# Altium PCB PCB1.PcbDoc
Units mil, origin at the board's own origin, x right, y up, seen from the top; angles counter-clockwise.
Board outline 2505.03 x 1155.03 mil, 2 copper layers (Top Layer, Bottom Layer); 30 components, 29 nets, 108 pads, 13 vias.
Unrouted connection lines stored in the file: 1.
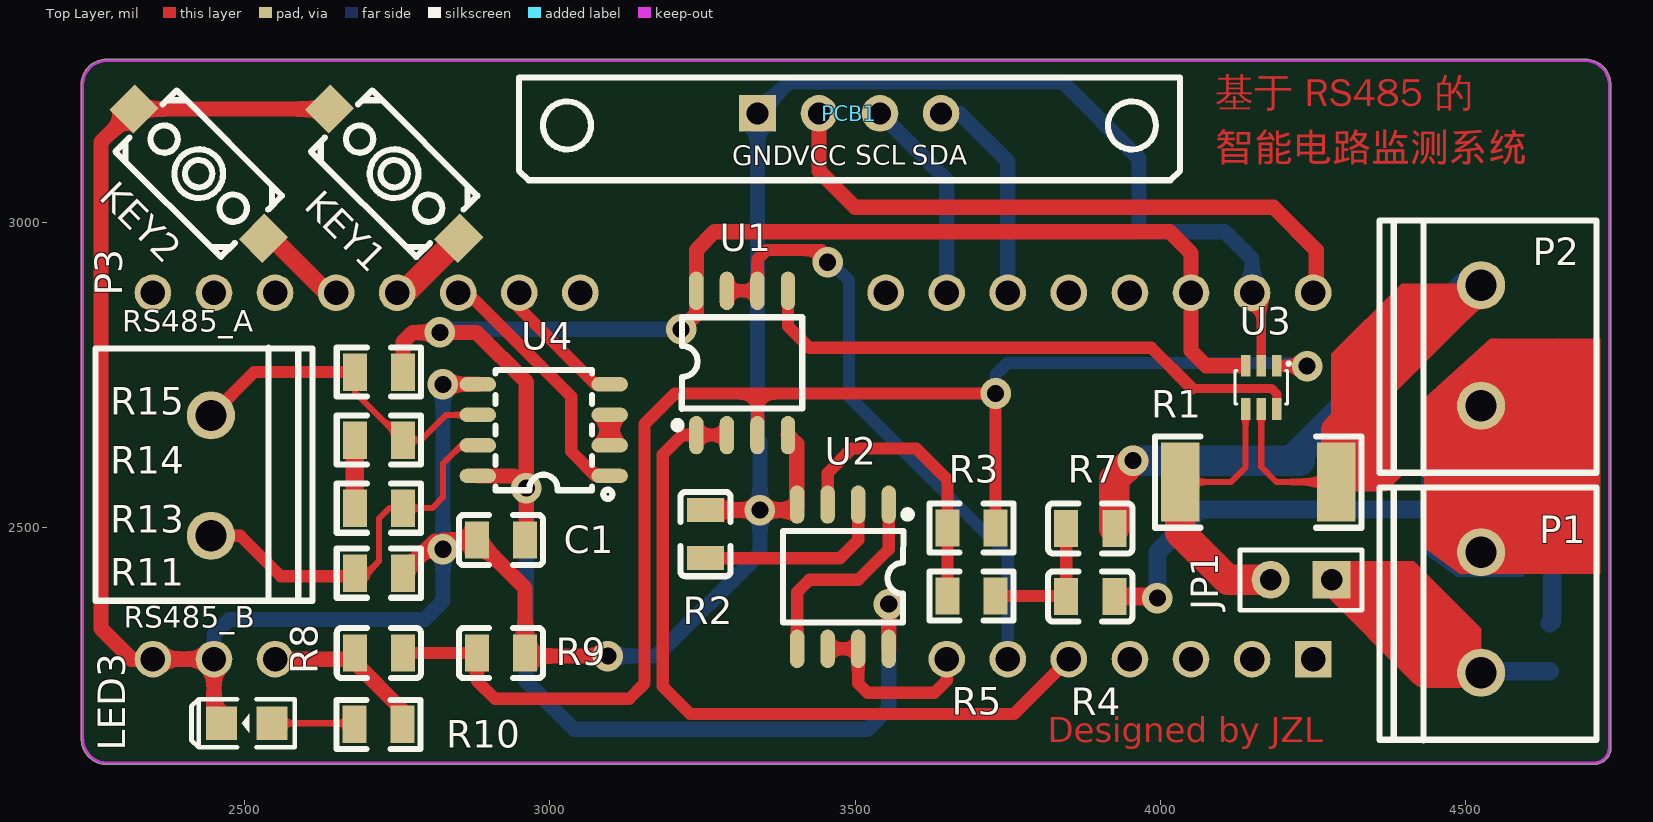
[diagram p0: Top Layer view]
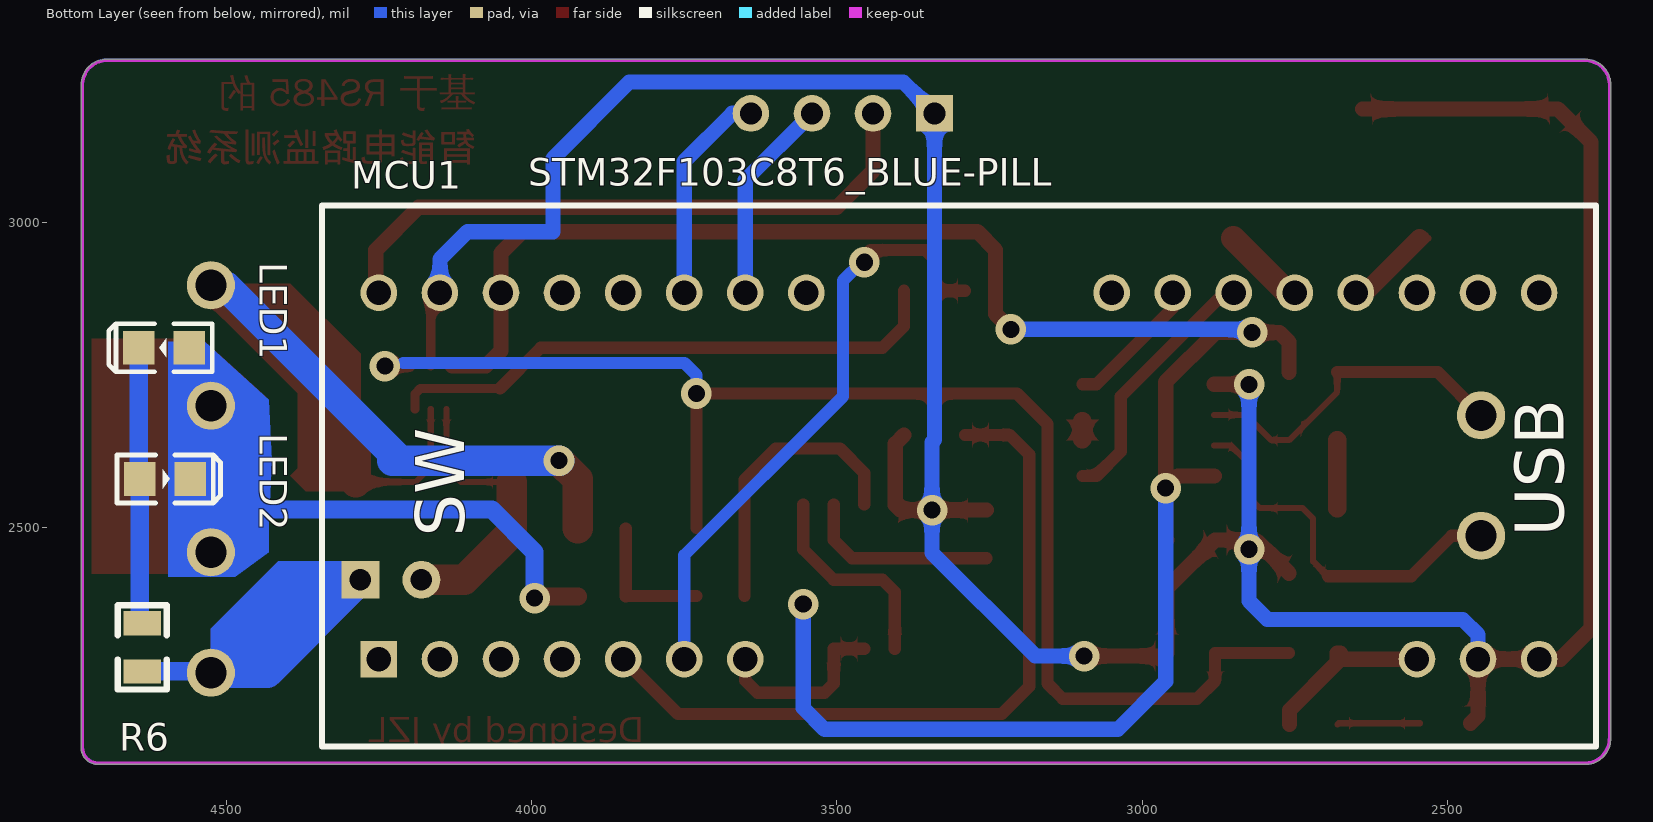
[diagram p1: Bottom Layer view, seen from below]

## Layer stack, top to bottom
Top Solder: solder mask 0.4, Solder Resist, Dk 3.5
Top Layer: signal copper 1.4
Dielectric 1: dielectric 12.6, FR-4, Dk 4.8
Bottom Layer: signal copper 1.4
Bottom Solder: solder mask 0.4, Solder Resist, Dk 3.5

## Board outline
2232.49,2154.08 2232.49,3225.31 cw(c2235,3225.31) 2232.49,3225.37 cw(c2274.39,3225.61) 2273.99,3267.51 cw(c2274.39,3225.61) 2274.07,3267.51 2274.09,3267.51 4695.61,3267.51 ccw(c4695.61,3225.61) 4695.29,3267.51 4695.61,3267.51 cw(c4695.61,3225.61) 4737.51,3226.01 cw(c4695.61,3225.61) 4737.51,3225.93 4737.52,3225.91 ccw(c4735,3225.91) 4737.51,3226.01 4737.52,3225.91 4737.52,2140 ccw(c4710,2140) 4737.51,2140.21 4737.52,2140 cw(c4710,2140) 4710.21,2112.49 cw(c4710.19,2115) 4710.11,2112.49 cw(c4710,2115) 4710,2112.49 2275.01,2112.49 ccw(c2274.7,2154.39) 2275.02,2112.49 2275.01,2112.49 cw(c2274.7,2154.39) 2232.82,2152.83 cw(c2235,2154.08)

## Design rules (kind name [scope] priority, off if disabled: settings)
Clearance Clearance_9 [InNamedPolygon('Top Layer-No Net')] p1: gap=10 ignorepadtopadclearanceinfootprint=FALSE except(0: Arc-Hole Track-Hole SMDPad-Hole THPad-Hole Via-Hole Fill-Hole Poly-Hole Region-Hole Text-Hole)
Clearance Clearance_8 [InNamedPolygon('Top Layer-No Net')] p2: gap=10 ignorepadtopadclearanceinfootprint=FALSE except(0: Arc-Hole Track-Hole SMDPad-Hole THPad-Hole Via-Hole Fill-Hole Poly-Hole Region-Hole Text-Hole)
Clearance Clearance_7 [InNamedPolygon('Top Layer-No Net')] p3: gap=16 ignorepadtopadclearanceinfootprint=FALSE except(0: Arc-Hole Track-Hole SMDPad-Hole THPad-Hole Via-Hole Fill-Hole Poly-Hole Region-Hole Text-Hole)
Clearance Clearance_6 [InNamedPolygon('Top Layer-No Net')] p4: gap=18 ignorepadtopadclearanceinfootprint=FALSE except(0: Arc-Hole Track-Hole SMDPad-Hole THPad-Hole Via-Hole Fill-Hole Poly-Hole Region-Hole Text-Hole)
Clearance Clearance_5 [InNamedPolygon('Top Layer-No Net')] p5: gap=20 ignorepadtopadclearanceinfootprint=FALSE except(0: Arc-Hole Track-Hole SMDPad-Hole THPad-Hole Via-Hole Fill-Hole Poly-Hole Region-Hole Text-Hole)
Clearance Clearance_4 [InNamedPolygon('Top Layer-No Net')] p6: gap=10 ignorepadtopadclearanceinfootprint=FALSE except(0: Arc-Hole Track-Hole SMDPad-Hole THPad-Hole Via-Hole Fill-Hole Poly-Hole Region-Hole Text-Hole)
Clearance Clearance_3 [InNamedPolygon('Top Layer-No Net')] p7: gap=10 ignorepadtopadclearanceinfootprint=FALSE except(0: Arc-Hole Track-Hole SMDPad-Hole THPad-Hole Via-Hole Fill-Hole Poly-Hole Region-Hole Text-Hole)
Clearance Clearance_2 [InNamedPolygon('Top Layer-No Net')] p8: gap=20 ignorepadtopadclearanceinfootprint=FALSE except(0: Arc-Hole Track-Hole SMDPad-Hole THPad-Hole Via-Hole Fill-Hole Poly-Hole Region-Hole Text-Hole)
Clearance Clearance_1 [InNamedPolygon('Top Layer-No Net1')] p9: gap=20 ignorepadtopadclearanceinfootprint=FALSE except(0: Arc-Hole Track-Hole SMDPad-Hole THPad-Hole Via-Hole Fill-Hole Poly-Hole Region-Hole Text-Hole)
Clearance [All] p10: gap=6 ignorepadtopadclearanceinfootprint=FALSE except(0: Arc-Hole Track-Hole SMDPad-Hole THPad-Hole Via-Hole Fill-Hole Poly-Hole Region-Hole Text-Hole)
PolygonConnect [All] p1: connectstyle=Relief reliefconductorwidth=10 reliefentries=4 polygonreliefangle="90 Angle" airgapwidth=10
RoutingVias [All] p1: holewidth=28 width=50 viastyle="Through Hole" minholewidth=28 minwidth=50 maxholewidth=28 maxwidth=50
SolderMaskExpansion [All] p1: expansion=4
Width [All] p1: maxlimit=50 minlimit=5 preferedwidth=10
30 further rules are at their usual default settings.

## Components (designator, comment, footprint, x,y, rotation, side; value= is the part's Value field where it differs from the comment)
C1 "0.1u" C0805 2920,2480 r0 top
JP1 "JUMPER" HDR-F-2.54_1X2 4230.29,2415 r180 top
KEY1 "K2-3.6×6.1_SMD" KEY-SMD_2P-L6.2-W3.6-LS8.0 2745,3080 r135 top
KEY2 "K2-3.6×6.1_SMD" KEY-SMD_2P-L6.2-W3.6-LS8.0 2425,3080 r135 top
LED1 "LED-0805_G" LED0805_GREEN 4601.73,2795 r0 bottom
LED2 "LED-0805_G" LED0805_GREEN 4600,2580 r180 bottom
LED3 "LED-0805_G" LED0805_GREEN 2503.65,2180 r180 top
MCU1 "STM32F103C8T6_BLUE-PILL" STM32F103C8T6_BLUE-PILL 4250,2285 r90 bottom locked
P1 "CONN-TH_2P-P5.00" CONN-TH_2P-P5.00 4525,2361.4 r90 top
P2 "CONN-TH_2P-P5.00" CONN-TH_2P-P5.00 4525,2798.6 r90 top
P3 "CONN-TH_2P-P5.00" CONN-TH_2P-P5.00 2445,2585.53 r270 top
PCB1 "SSD1306-128x64-OLED-I2C" SSD1306_GNDVCC 2949.41,2145.24 r0 top locked
R1 "0.01" R2512 4160,2575 r180 top
R2 "10k" C0805 3255,2489.69 r90 top
R3 "10k" R0805 3690.63,2499.85 r0 top
R4 "3k" C0805 3885,2387.48 r0 top
R5 "10k" R0805 3690.63,2388.27 r0 top
R6 "10k" R0805 4637.52,2304.37 r90 bottom
R7 "1k" C0805 3885,2499.06 r180 top
R8 "10k" C0805 2720,2295 r180 top
R9 "10k" C0805 2920,2295 r180 top
R10 "1K" R0805 2719.37,2178.15 r0 top
R11 "3.3K" R0805 2720,2425.75 r180 top
R13 "0" R0805 2720,2532.17 r0 top
R14 "120" R0805 2720,2643.58 r180 top
R15 "3.3K" R0805 2720,2755 r0 top
U1 "LM358" SOP-8_L4.9-W3.9-P1.27-LS6.0-BL 3315,2770 r0 top
U2 "LM358" SOP-8_L4.9-W3.9-P1.27-LS6.0-BL 3480,2420 r180 top
U3 "INA199A1DCKR" SOT-363_L2.0-W1.3-P0.65-LS2.1-BR 4165,2730 r90 top
U4 "MAX13487EESA" SOIC-8_L4.9-W3.9-P1.27-LS6.0-BL 2990,2660 r90 top

## Footprints (in the part's own frame and the unit in brackets; to place one, negate y for a bottom-side part, rotate by r counter-clockwise, add the part's x,y. Pads: shape width x height; smd on the part's side, far side on the other; paste and mask are expansions set on the pad)
C0805 [mm]
  rect 1x1.55 smd: 1(-1,0) 2(1,0)
  silkscreen extent -1.75,-1.04 1.75,1.04
CONN-TH_2P-P5.00 [mm]
  round 2 hole 1.3: 1(-2.504,0) 2(2.504,0)
  silkscreen extent -5.32,-4.8 5.21,4.23
HDR-F-2.54_1X2 [mil]
  rect 62x62 hole 35: 1(-50,0)
  round 62 hole 35: 2(50,0)
  silkscreen extent -100,-49 100,50
KEY-SMD_2P-L6.2-W3.6-LS8.0 [mm]
  rect 1.4x1.5 smd: 1(-3.8,0) 2(3.8,0)
  silkscreen extent -3.1,-1.8 3.1,1.8
LED0805_GREEN [mil]
  rect 51.2x55.1 smd: 1(-41.35,0) 2(41.35,0)
  silkscreen extent -79,-39 91,39
R0805 [mm]
  rect 1x1.55 smd: 1(-1,0) 2(1,0)
  silkscreen extent -1.75,-1.02 1.75,1.02
R2512 [mm]
  rect 1.6x3.3 smd: 1(-3.25,0) 2(3.25,0)
  silkscreen extent -4.3,-1.9 4.3,1.9
SOIC-8_L4.9-W3.9-P1.27-LS6.0-BL [mm]
  oval 0.6x1.518 smd: 1(-1.905,-2.74) 2(-0.635,-2.74) 3(0.635,-2.74) 4(1.905,-2.74) 5(1.905,2.74) 6(0.635,2.74) 7(-0.635,2.74) 8(-1.905,2.74)
  silkscreen extent -2.86,-2.86 2.5,2
SOP-8_L4.9-W3.9-P1.27-LS6.0-BL [mm]
  oval 0.6x1.598 smd: 1(-1.905,-3) 2(-0.635,-3) 3(0.635,-3) 4(1.905,-3) 5(1.905,3) 6(0.635,3) 7(-0.635,3) 8(-1.905,3)
  silkscreen extent -2.84,-2.74 2.5,1.9
SOT-363_L2.0-W1.3-P0.65-LS2.1-BR [mm]
  rect 0.9x0.4 smd: 1(0.9,-0.65) 2(0.9,0) 3(0.9,0.65) 4(-0.9,0.65) 5(-0.9,0) 6(-0.9,-0.65)
  silkscreen extent -0.7,-1.21 1.06,1.1
SSD1306_GNDVCC [mil]
  rect 60x60 hole 36: 1(390.59,1033.48)
  round 60 hole 36: 2(491.3,1033.5) 3(591.3,1033.5) 4(691.3,1033.5)
  silkscreen extent 0,924 1083,1093
STM32F103C8T6_BLUE-PILL [mil]
  rect 60x60 hole 40: 1(0,0)
  round 60 hole 40: 2(0,-100) 3(0,-200) 4(0,-300) 5(0,-400) 6(0,-500) 7(0,-600) 18(0,-1700) 19(0,-1800) 20(0,-1900) 21(600,-1900) 22(600,-1800) 23(600,-1700) 24(600,-1600) 25(600,-1500) 26(600,-1400) 27(600,-1300) 28(600,-1200) 33(600,-700) 34(600,-600) 35(600,-500) 36(600,-400) 37(600,-300) 38(600,-200) 39(600,-100) 40(600,0)
  silkscreen extent -143,-1993 743,93

## Via types
v1: diameter 50, hole 28, Top Layer to Bottom Layer, 13 vias

## Nets (pads, with @x,y where several pads share a name; then routed paths per layer and width w, separated by ;. In a path a pad name is that pad's centre, name@x,y a point inside that pad or via, vN(x,y) a via of type N, cw(c..) or ccw(c..) an arc to the next point about the centre after c; other vN are vias at no path point)
+5V: C1.2 MCU1.38 R15.2 U1.8 U2.8 U3.3 U4.8 | length 3464.7
  Top Layer w25: R15.2 2759.37,2804.37 2775,2820 v1(2820,2820) 2880,2820 2961.51,2738.49 v1(2961.51,2565) ; U4.8 2941.51,2585 v1(2961.51,2565) ; C1.2 2961.51,2480 v1(2961.51,2565) ; v1(3215,2825) 3240,2850 U1.8 3240,2955 3270,2985 4015,2985 4050,2950 MCU1.38 4050,2790 4074.57,2765.43 4130,2765.43 ; U2.8 v1(3555,2375)
  Bottom Layer w25: v1(2820,2820) 2825,2825 v1(3215,2825) ; v1(2961.51,2565) 2961.51,2248.49 3040,2170 3520,2170 3555,2205 v1(3555,2375)
ADC0: MCU1.5 U1.1 U1.2 | length 1219.1
  Top Layer w20: U1.2 U1.1 3216.89,2651.89 3185,2620 3185,2240 3230,2195 3760,2195 MCU1.5
ADC1: MCU1.6 U1.6 U1.7 | length 1012.4
  Top Layer w20: U1.7 U1.6 3340,2940 3355,2955 3445,2955 3455,2945 v1(3455,2935)
  Bottom Layer w20: v1(3455,2935) 3460,2935 3490,2905 3490,2715 3750,2455 MCU1.6
ADC2: MCU1.7 U2.6 U2.7 | length 301.4
  Top Layer w20: U2.6 U2.7 3505,2245 3520,2230 3630,2230 3650,2250 MCU1.7
GND: C1.1 KEY1.2 KEY2.2 LED3.2 MCU1.19 MCU1.20 MCU1.39 PCB1.1 R2.2 R9.1 R11.1 U1.4 U2.4 U3.2 U4.5 | length 5364.3
  Top Layer w15: MCU1.39@4150,2880 4165,2865 U3.2
  Top Layer w25: LED3.2 2450,2192.3 MCU1.19 MCU1.20 2315,2285 2265,2335 2265,3131.57 KEY2.2 KEY1.2 ; R11.1 v1@2811.81,2478.19 ; v1@2825,2480 C1.1 2959.37,2401.26 R9.1 2969.37,2285 2974.37,2290 v1(3095,2290) ; v1(2825,2735) U4.5 ; R2.2 v1(3344.06,2529.06) 3395.95,2529.06 3404.37,2537.48 3404.37,2637.52 U1.4 ; MCU1.39@4150,2880 MCU1.39
  Bottom Layer w25: MCU1.19 2450,2325 2475,2350 2795,2350 2825,2380 v1(2825,2465) v1(2825,2735) ; v1(3095,2290) 3175,2290 3344.06,2459.06 v1(3344.06,2529.06) 3344.06,2640 3340,2644.06 PCB1.1 3391.28,3230 3840,3230 3965,3105 3965,2985 4105,2985 4150,2940 MCU1.39
I2C_SCL: MCU1.34 PCB1.3 | length 339
  Bottom Layer w25: PCB1.3 3650,3069.45 MCU1.34
I2C_SDA: MCU1.35 PCB1.4 | length 356.9
  Bottom Layer w25: PCB1.4 3671.26,3178.74 3750,3100 MCU1.35
NetJP1_1: JP1.1 P1.1 R6.1 | length 728.9
  Top Layer w50: JP1.1 4432.49,2262.8 P1.1
  Bottom Layer w30: P1.1 4527.2,2265 R6.1
  Bottom Layer w50: JP1.1 4432.49,2262.8 P1.1
NetJP1_2: JP1.2 R1.2 U3.4 | length 475.2
  Top Layer w10: R1.2 4115,2575 4139.41,2599.41 U3.4
  Top Layer w50: R1.2 4032.05,2492.95 4110,2415 JP1.2
NetKEY1_1: KEY1.1 MCU1.25 | length 137.7
  Top Layer w10: MCU1.25 MCU1.25@2761.57,2885
  Top Layer w40: MCU1.25@2761.57,2885 KEY1.1
NetKEY2_1: KEY2.1 MCU1.24 | length 156.2
  Top Layer w10: KEY2.1 KEY2.1@2545.79,2974.21
  Top Layer w30: KEY2.1@2545.79,2974.21 2635,2885 MCU1.24
NetLED1_2: LED1.2 LED2.1 R6.2 | length 453.6
  Bottom Layer w30: R6.2 4641.35,2347.57 LED2.1 4643.08,2581.73 LED1.2
NetLED3_1: LED3.1 R10.1 | length 135.8
  Top Layer w10: LED3.1 2678.15,2180 R10.1
NetLED4_1: 
NetR2_1: R2.1 U2.2 | length 320.4
  Top Layer w20: R2.1 3475.32,2450.32 3505,2480 U2.2
NetR3_1: R3.1 R5.1 U2.3 | length 476.4
  Top Layer w20: U2.3 3455,2590 3495,2630 3600,2630 3651.26,2578.74 R3.1 R5.1
NetR4_1: R4.1 R5.2 R7.2 | length 228.7
  Top Layer w10: 3844.84,2418.27 R4.1@3845.63,2417.48
  Top Layer w20: R5.2 3844.84,2388.27 R4.1 3845.63,2417.48 R7.2
NetR13_1: R13.1 R14.2 | length 111.4
  Top Layer w30: R13.1 R14.2
NetU4_2: U4.2 U4.3 | length 30
  Top Layer w30: U4.2@3097.87,2645 U4.3@3097.87,2675
out0: U1.5 U3.6 | length 929.4
  Top Layer w15: 4051.71,2728.29 4181.71,2728.29 4190.59,2719.41 U3.6
  Top Layer w20: U1.5 3390,2830 3425,2795 3985,2795 4051.71,2728.29
out1: U2.1 U2.5 | length 345.2
  Top Layer w20: U2.5 3405,2395 3425,2415 3505,2415 3555,2465 U2.1
REF: R3.2 R8.1 R9.2 U1.3 U3.1 | length 2331.3
  Top Layer w20: R8.1 R9.2 2880.63,2249.37 2910,2220 3130,2220 3155,2245 3155,2670 3205,2720 3340,2720 ; U1.3 3340,2720 ; R3.2 v1(3730,2720) 3340,2720 ; 4200,2765 v1(4240,2765)
  Bottom Layer w20: v1(3730,2720) 3730,2750.43 3749.57,2770 4210,2770
RS485_A: P3.2 R11.2 R13.2 U4.7 | length 626.5
  Top Layer w10: R11.2@2695.75,2420.75 2720,2445 2720,2515 2737.17,2532.17 R13.2 2807.17,2532.17 2825,2550 2825,2605 2855,2635 U4.7
  Top Layer w20: P3.2 2493.07,2486.93 2559.25,2420.75 R11.2@2695.75,2420.75
RS485_B: P3.1 R14.1 R15.1 U4.6 | length 548.9
  Top Layer w10: R15.1 2680.63,2722.32 R14.1 2788.58,2643.58 2830,2685 U4.6
  Top Layer w20: P3.1 2515.87,2755 R15.1
RXD: MCU1.26 U4.1 | length 424.9
  Top Layer w20: MCU1.26 2865,2885 3035,2715 3035,2625 3075,2585 U4.1
TXD: MCU1.27 U4.4 | length 224.7
  Top Layer w20: MCU1.27 2950,2860 3075,2735 U4.4
V3.3: MCU1.18 MCU1.40 PCB1.2 R8.2 R10.2 | length 1319.2
  Top Layer w25: MCU1.18 R8.2@2680.63,2285 ; R8.2@2675.63,2295 R8.2@2680.63,2290 ; R8.2 R8.2@2680.63,2290 ; R10.2 2758.74,2201.26 2680.63,2279.37 R8.2@2680.63,2285 ; PCB1.2 3440.71,3084.29 3500,3025 4185,3025 4255,2955 MCU1.40@4255,2885 ; R8.2@2680.63,2285 R8.2@2680.63,2290
V_IN+: LED1.1 LED2.2 P1.2 P2.1 R4.2 | length 1351.2
  Top Layer w30: R4.2 3992.52,2387.48 v1(3995,2385)
  Top Layer w50: P1.2 P2.1
  Bottom Layer w30: v1(3995,2385) 3995,2460 4065,2530 4505,2530 4525,2510 ; P1.2 4525,2510 ; LED2.2 4525,2613.65 ; LED1.1 4525,2759.62 P2.1 4525,2613.65 ; 4525,2510 4525,2613.65
V_IN-: P2.2 R1.1 R7.1 U3.5 | length 1482.7
  Top Layer w10: U3.5 4165,2600 4190,2575 R1.1
  Top Layer w50: R7.1 3924.37,2579.37 v1(3955,2610) ; R1.1 4287.95,2660.16 P2.2
  Bottom Layer w50: v1(3955,2610) 4227.8,2610 4221.4,2616.4 4500,2895 P2.2@4535,2895
pads on no net: MCU1.1 MCU1.2 MCU1.3 MCU1.4 MCU1.21 MCU1.22 MCU1.23 MCU1.28 MCU1.33 MCU1.36 MCU1.37

## Polygon pours and split planes (outlines as drawn)
GND on Top Layer "Top Layer-No Net" (solid, remove dead copper, shelved, pour order 0): 2232.49,2154.08 2232.49,3225.31 cw(c2235,3225.31) 2232.49,3225.37 cw(c2274.39,3225.61) 2273.99,3267.51 cw(c2274.41,3225.57) 2274.07,3267.51 2274.09,3267.51 4695.61,3267.51 ccw(c4695.61,3225.61) 4695.29,3267.51 4695.61,3267.51 cw(c4695.61,3225.61) 4737.51,3226.01 cw(c4695.57,3225.59) 4737.51,3225.93 4737.52,3225.91 ccw(c4735,3225.92) 4737.51,3226.01 4737.52,3225.91 4737.52,2140 ccw(c4709.99,2140) 4737.51,2140.21 4737.52,2140 cw(c4710,2140) 4710.21,2112.49 cw(c4710.19,2115) 4710.11,2112.49 cw(c4710,2115) 4710,2112.49 2275.01,2112.49 ccw(c2275.02,2154.37) 2275.02,2112.49 2275.01,2112.49 cw(c2274.7,2154.39) 2232.82,2152.83 cw(c2235,2154.08)
GND on Bottom Layer "Top Layer-No Net1" (solid, shelved, pour order 1): 2232.49,2154.08 2232.49,3225.31 cw(c2235,3225.31) 2232.49,3225.37 cw(c2274.39,3225.61) 2273.99,3267.51 cw(c2274.41,3225.57) 2274.07,3267.51 2274.09,3267.51 4695.61,3267.51 ccw(c4695.61,3225.61) 4695.29,3267.51 4695.61,3267.51 cw(c4695.61,3225.61) 4737.51,3226.01 cw(c4695.57,3225.59) 4737.51,3225.93 4737.52,3225.91 ccw(c4735,3225.92) 4737.51,3226.01 4737.52,3225.91 4737.52,2140 ccw(c4709.99,2140) 4737.51,2140.21 4737.52,2140 cw(c4710,2140) 4710.21,2112.49 cw(c4710.19,2115) 4710.11,2112.49 cw(c4710,2115) 4710,2112.49 2275.01,2112.49 ccw(c2275.02,2154.37) 2275.02,2112.49 2275.01,2112.49 cw(c2274.7,2154.39) 2232.82,2152.83 cw(c2235,2154.08)

## Keep-outs
Keep-Out Layer:
  lines w5: 2235,2154.08 2235,3225.31 cw(c2274.39,3225.61) 2274.09,3265 4695.61,3265 ; 2235.31,2154.08 ccw(c2274.7,2154.39) 2275,2115 4710,2115 ; 4695.31,3265 cw(c4695.61,3225.61) 4735,3225.91 4735,2140 ; 4710.19,2115 ccw(c4710,2140) 4735,2140.19
Mechanical 1:
  lines w5: 2235,2154.08 2235,3225.31 cw(c2274.39,3225.61) 2274.09,3265 4695.61,3265 ; 2235.31,2154.08 ccw(c2274.7,2154.39) 2275,2115 4710,2115 ; 4695.31,3265 cw(c4695.61,3225.61) 4735,3225.91 4735,2140 ; 4710.19,2115 ccw(c4710,2140) 4735,2140.19

## Other copper
Top Layer:
  pour cut-out: 2780,2795.16 2780,2760 2790,2750 2795,2755 2905,2755 2905,2775 2870,2800
  pour cut-out: 4145,2445 4145,2385 4162.65,2367.35 4278.02,2367.35 4278.02,2440
  pour cut-out: 3170,2230 3130,2200 3165,2175 3230,2175
  pour cut-out: 4439.28,2449.28 4439.28,2448.17 4432.77,2441.65 4534.42,2340 4534.42,2406.94 4540.43,2412.95 4506.95,2412.95 4505.1,2414.8 4490,2414.8
  pour cut-out: 4565,2880 4545,2860 4545,2810 4525,2810 4425,2710 4425,2440 4125.71,2440 4065.51,2500.2 4070,2504.68 4070,2570 4240,2570 4254.49,2555.51 4254.49,2500.2 4320,2500.2 4320,2555 4390,2555 4395,2560 4390,2565 4390,2720
  region net V_IN+: 4435,2715 4430,2615 4435,2510 4435,2465 4490,2425 4530,2425 4550,2425 4720,2425 4720,2810 4540,2810
  region net NetJP1_1: 4260,2445 4415,2445 4525,2335 4525,2262.8 4432.49,2262.8
  region net V_IN-: 4525,2897.2 4522.2,2900 4395,2900 4280,2785 4280,2560 4370,2560 4395,2585 4382.8,2597.2 4382.8,2755
  text "基于 RS485 的" at 4090,3175 h80
  text "智能电路监测系统" at 4090.07,3085 h80
  text "Designed by JZL" at 3815,2135 h70
Bottom Layer:
  pour cut-out: 4605,2405 4606.05,2403.95 4606.05,2383.43 4590,2367.38 4590,2295 4560,2295 4530,2325 4530,2350 4475,2405
  pour cut-out: 4420,2460 4415,2465 4415,2500 4075,2500 4025,2450 4034.28,2440.72 4150.72,2440.72 4165,2455 4210.73,2455 4224.29,2441.44 4227.86,2445 4240,2445 4240,2455 4245,2460
  pour cut-out: 4510,2850 4505,2850 4245,2590 4245,2560 4410,2560 4420,2570 4420,2715 4525,2820
  region net NetJP1_1: 4260,2445 4415,2445 4525,2335 4525,2262.8 4432.49,2262.8
  region net V_IN+: 4430,2710 4425,2610 4430,2505 4430,2460 4485,2420 4525,2420 4545,2420 4595,2420 4595,2715 4595,2725 4595,2765 4595,2805 4535,2805

## Silkscreen, mask and mechanical layers (free items; w line width, h text height)
Top Overlay:
  lines w10: 2949.41,3237.76 2949.41,3085 2965.16,3069.25 ; 4016.34,3069.25 4032.09,3085 4032.09,3237.76
  text "RS485_A" at 2300,2810 h60
  text "RS485_B" at 2302.46,2325 h60
Top Solder:
  text "基于 RS485 的" at 4090,3175 h80
  text "智能电路监测系统" at 4090.07,3085 h80
  text "Designed by JZL" at 3815,2135 h70

## Text inside footprints (layer, text, board x,y; h text height)
MCU1: Bottom Overlay "SW" at 4110,2485 h80 r270; Bottom Overlay "USB" at 2310,2485 h80 r270
PCB1: Top Overlay "SCL" at 3500.51,3094.89 h31.5; Top Overlay "SDA" at 3593.01,3094.49 h31.5; Top Overlay "GND" at 3298.61,3094.09 h31.5; Top Overlay "VCC" at 3396.21,3094.09 h31.5